# Altium PCB OSSI-1 COMMS.PcbDoc (part 2 of 2)
Units mil, origin at the board's own origin, x right, y up, seen from the top; angles counter-clockwise.
Board outline 3701 x 3701 mil, 2 copper layers (Top, Bottom), stack 61.811 mil thick; 188 components, 164 nets, 655 pads, 444 vias.
Unrouted connection lines stored in the file: 11.
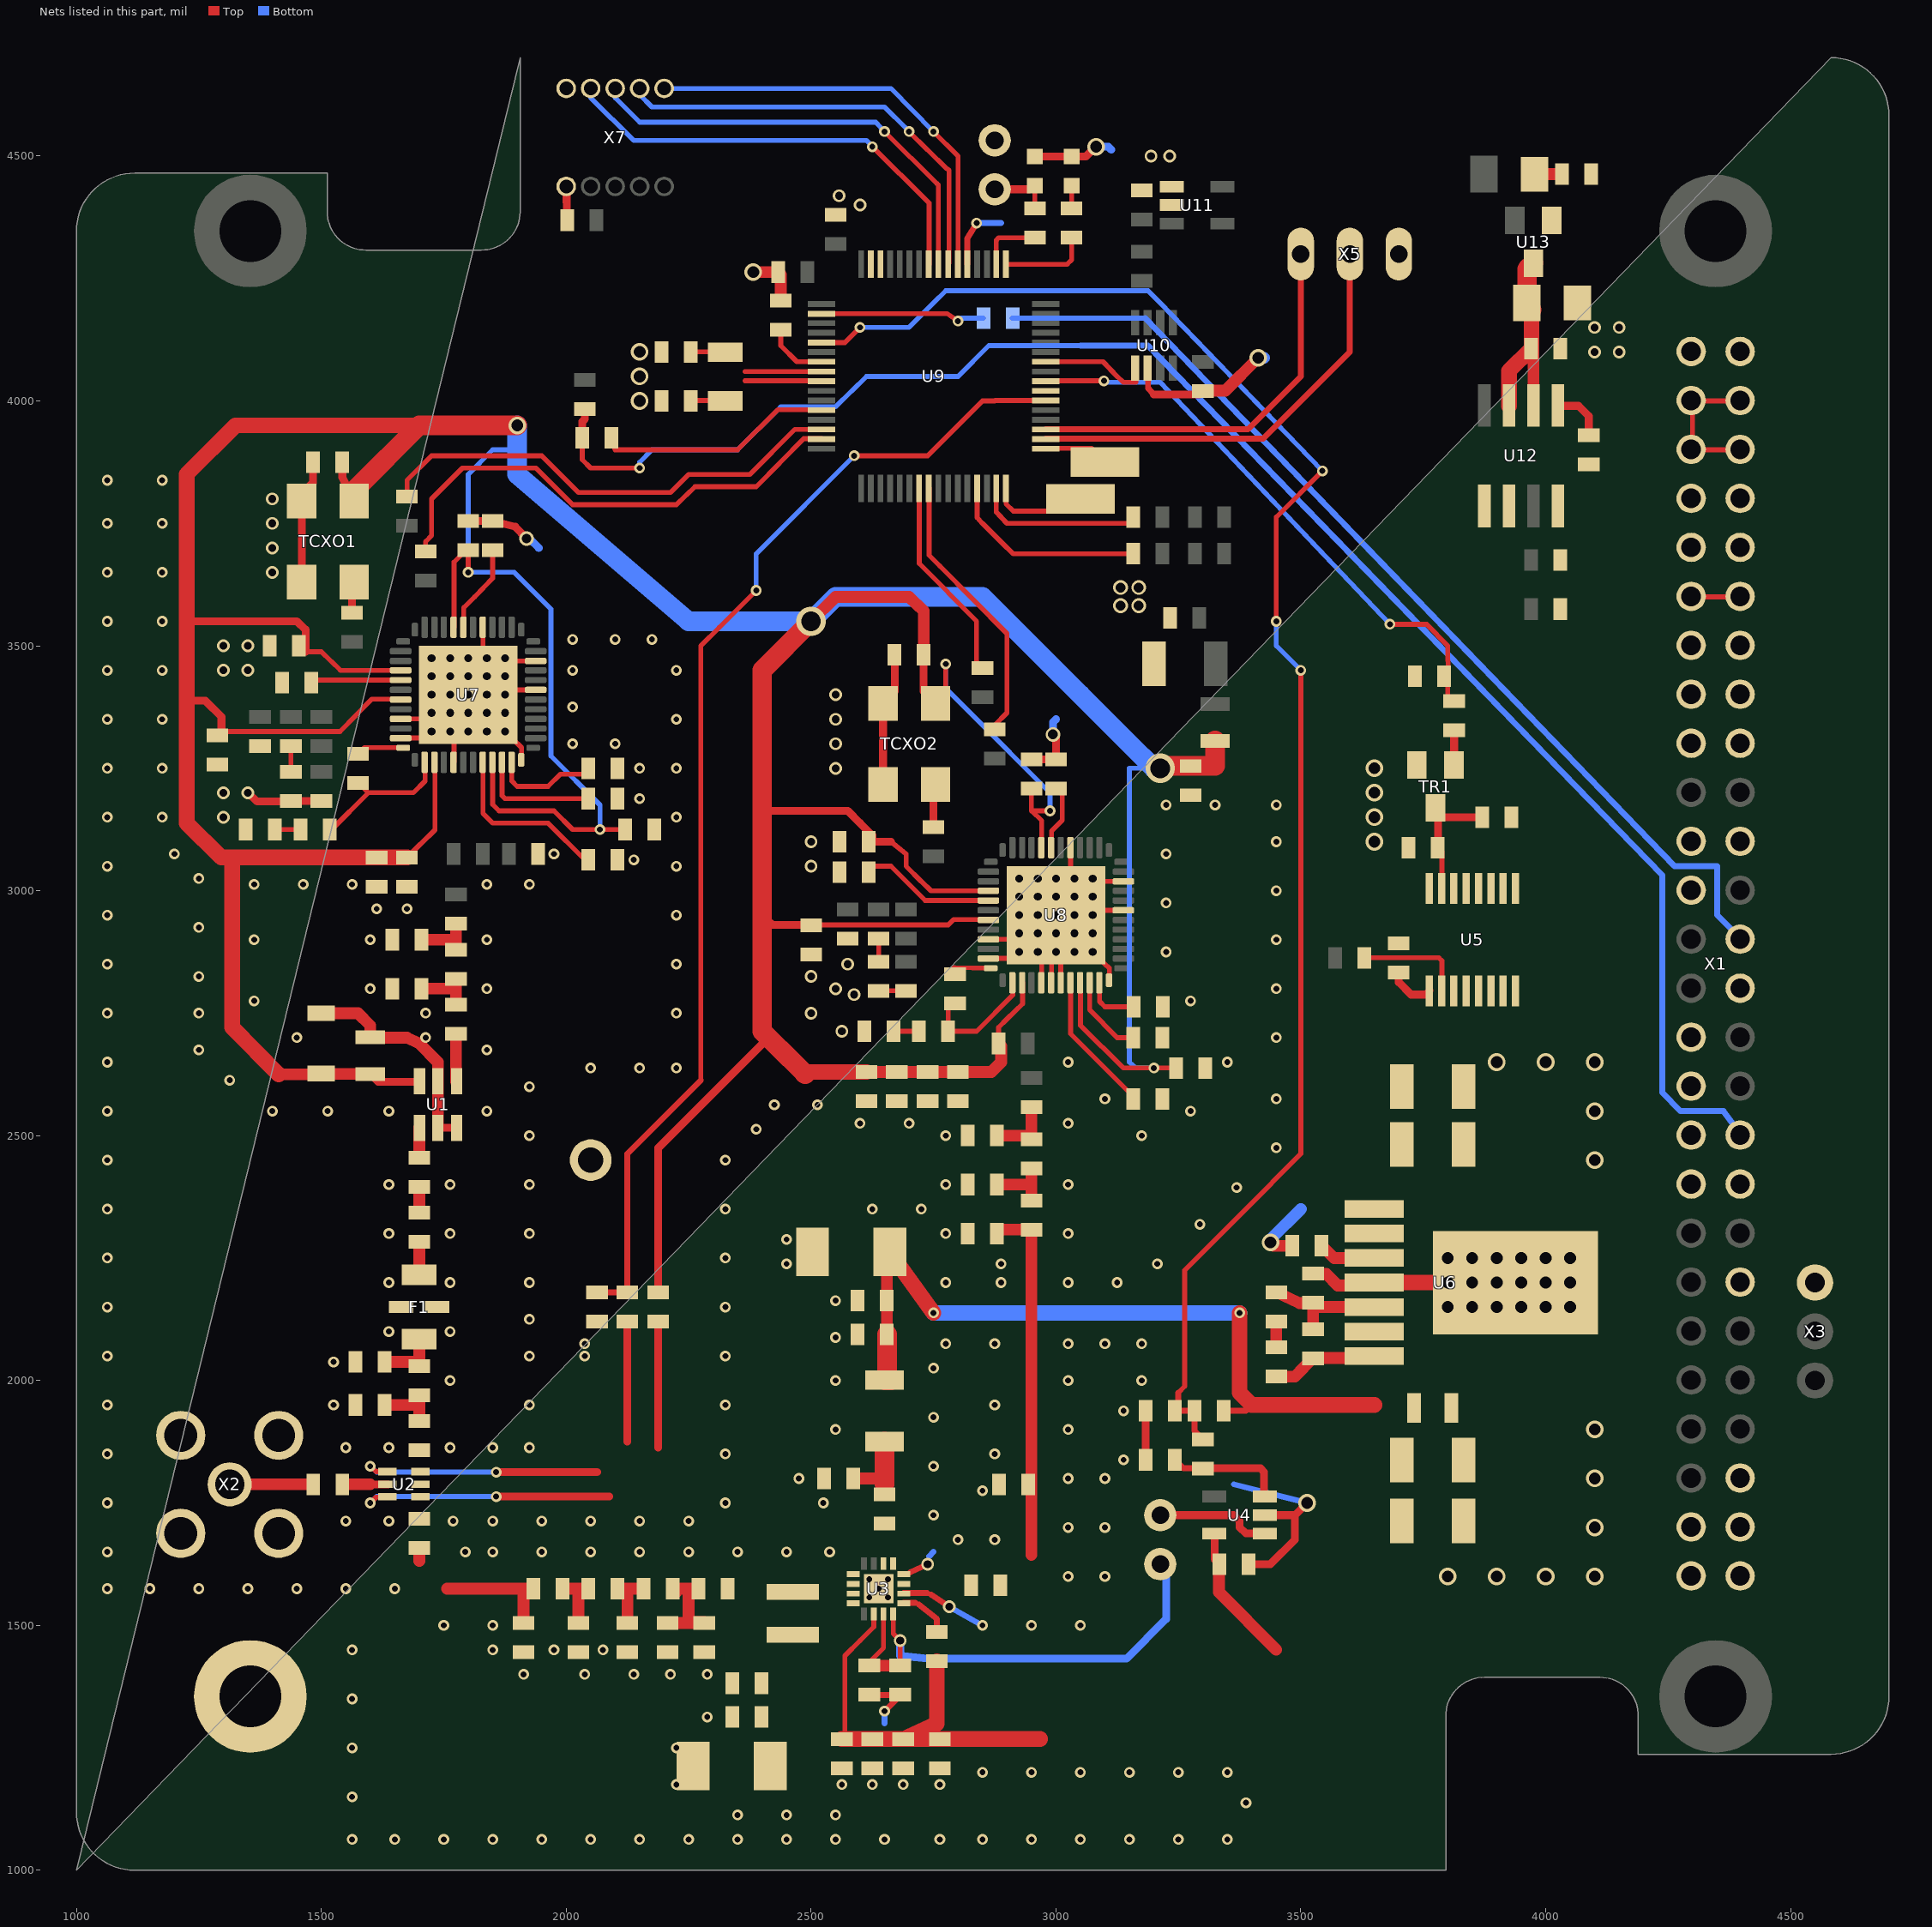
[diagram p2: the nets of this part, all layers, seen from the top]

## Via types
v1: diameter 22/22 (per signal layer), hole 12, Top to Bottom, 306 vias
v2: diameter 26/26 (per signal layer), hole 16, Top to Bottom, 87 vias
v3: diameter 36/36 (per signal layer), hole 24, Top to Bottom, 43 vias
v4: diameter 30/30 (per signal layer), hole 20, Top to Bottom, 6 vias
v5: diameter 60/60 (per signal layer), hole 40, Top to Bottom, 2 vias

## Nets (pads, with @x,y where several pads share a name; then routed paths per layer and width w, separated by ;. In a path a pad name is that pad's centre, name@x,y a point inside that pad or via, vN(x,y) a via of type N, cw(c..) or ccw(c..) an arc to the next point about the centre after c; other vN are vias at no path point) (continued)
GND: C1.2 C2.2 C5.2 C6.P$2 C7.2 C11.P$2 C12.2 C13.2 C14.2 C16.1 C17.1 C18.2 C19.2 C20.2 C21.2 C22.2 C23.1 C27.2 C28.1 C29.2 C30.2 C31.2 C32.1 C33.2 C34.2 C35.2 C36.1 C37.P$2 C39.2 C40.2 C41.P$2 C42.P$2 C43.2 C44.2 C45.P$2 C46.P$2 C47.2 C48.2 C49.2 C50.2 C51.2 C52.2 C53.2 C56.2 C57.2 C58.2 C59.2 C60.2 C62.2 C63.2 C64.2 C65.2 C66.2 C67.2 C69.2 C70.2 C72.2 C73.2 C74.2 C75.2 C76.2 C77.2 C79.2 C80.2 C81.2 C82.2 C83.2 C84.2 C85.2 C86.2 C87.2 C88.2 C89.2 C91.2 C92.P$2 C93.2 F1.2 F1.4 JP2.2 L2.2 L4.2 LED1.C LED2.C R1.1 R4.1 R7.2 R8.2 R11.1 R13.2 R17.1 R18.2 R19.2 R22.1 R23.1 R24.1 R41.2 R42.1 R43.1 TCXO1.1 TCXO1.2 TCXO2.1 TCXO2.2 TP1.TP TR1.2 U1.2 U1.3 U1.5 U2.2 U3.2 U3.4 U3.TPAD U4.2 U5.8 U6.4 U6.PAD U7.5 U7.12 U7.19 U7.22 U7.29 U7.45 U7.47 U7.EXP U8.5 U8.6 U8.7 U8.12 U8.19 U8.22 U8.29 U8.45 U8.47 U8.EXP U9.53 U9.62 U9.63 U10.2 U11.1 U11.2 U12.4 U13.1 X1.1 X1.2 X1.51 X1.52 X2.2 X2.3 X2.4 X2.5 X3.3 X5.1 X7.9 | length 5529.6
  Top w4: U1.5@1738,2610 1738,2650
  Top w10: C58.2@1438,3183 C58.2@1450,3183 ; U7.47@1663,3312 1712,3312 1750,3350 v2(1763,3363) 1751,3351 U7.45@1663,3351 ; v2(1763,3325) 1771,3318 U7.5@1771,3263 ; U7.29@1830,3538 1830,3446 v2(1838,3438) 1850,3450 1869,3469 U7.22@1938,3469 ; v2(1838,3400) 1848,3410 U7.19@1938,3410 ; v2(1875,3325) 1909,3292 U7.12@1909,3268 ; C73.2@2638,2796 C73.2@2638,2788 ; C73.2@2638,2800 C73.2@2638,2788 ; C72.2@2694,2796 2646,2796 C73.2@2638,2788 ; U8.47@2863,2862 2912,2862 2950,2900 v2(2963,2913) 2951,2901 2863,2901 3000,2901 3000,2900 3010,2891 U8.7@3010,2813 ; v2(2963,2875) 2971,2868 U8.5@2971,2813 ; U8.6@2991,2813 2991,2866 v2(3000,2875) ; v2(3000,2913) v2(3000,2950) ; U8.29@3030,3088 3030,3033 v2(3038,3025) ; v2(3038,2950) 3048,2960 U8.19@3138,2960 ; v2(3038,2988) U8.EXP@3050,3000 ; v2(3075,2875) 3100,2850 3109,2842 U8.12@3109,2818 ; U8.22@3138,3019 U8.EXP@3069,3019 ; U4.2@3427,1725 3488,1725 ; U8.EXP@3050,3000 U8.EXP@3069,3019 ; U8.EXP@3050,3000 U8.EXP@3069,3019
  Top w12: C32.1@2619,1358 2680,1358 2675,1350 C28.1@2682,1357 ; v1(2650,1325) C28.1@2682,1357 ; U3.2@2689,1566 2737,1566 ; U3.4@2689,1605 U3.4@2695,1605 ; U3.4@2702,1608 v2(2738,1625) ; 2745,1563 v2(2782,1538) ; U9.53@2819,4279 2819,4332 v1(2838,4363) ; U10.2@3188,4067 3188,4026 3200,4013 ; C28.1@2682,1357 2682,1358 C28.1@2682,1357
  Top w16: v2(1350,3200) 1369,3182 1438,3182 1440,3183 1450,3183 C57.2@1500,3183 ; TCXO1.2@1460,3630 1460,3791 TCXO1.1@1450,3800 ; TCXO1.1@1460,3796 1460,3810 TCXO1.1@1450,3800 ; C59.2@1483,3875 1483,3833 TCXO1.1@1450,3800 ; U1.2@1738,2516 U1.3@1775,2516 ; C51.2@1800,3755 C50.2@1850,3755 1896,3743 v4(1919,3719) ; TCXO2.2@2647,3218 2647,3383 2671,3407 C76.2@2671,3482 ; C67.2@2950,3268 C66.2@3000,3268 3000,3313 v4(2994,3319) ; LED2.C@2957,4499 LED1.C@3032,4499 3061,4499 v3(3082,4519) ; C39.2@3183,1838 R13.2@3183,1938 ; 3200,4013 3293,4013 C85.2@3300,4021 ; C47.2@3393,1625 3438,1625 3488,1675 3488,1725 ; U4.2@3427,1725 3488,1725 ; v3(3513,1750) 3488,1725
  Top w24: C6.P$2@1500,2749 1502,2750 1575,2750 1600,2725 1600,2700 1601,2700 1675,2700 1700,2688 1738,2650 1738,2610 U1.2@1738,2516 ; v3(2382,4263) 2388,4263 C84.2@2433,4263 2438,4258 C82.2@2438,4205 ; C85.2@3300,4021 3346,4021 v3(3413,4088) ; v3(3438,2282) 3444,2275 C43.2@3483,2275 ; R8.2@3525,2218 3552,2218 3575,2194 3644,2194 U6.4@3650,2200
  Top w32: U6.4@3650,2200 v3(3800,2200) v3(3900,2200)
  Bottom w12: 2650,1300 v1(2650,1325) ; v2(2738,1625) v2@2740,1625 ; 2741,1641 2750,1650 ; v2(2782,1538) v1(2850,1500) ; v1(2838,4363) 2863,4363 2888,4363 ; 3363,1788 v3(3513,1750)
  Bottom w16: v4(1919,3719) 1925,3719 1944,3700 ; v4(2994,3319) 2994,3344 3000,3350 ; v3(3082,4519) 3107,4519 3113,4513
  Bottom w24: v3(3413,4088) v3@3425,4088 ; v3(3438,2282) 3438,2288 3500,2350
  other v1: 1563,1063 1650,1063 1750,1063 1850,1063 1950,1063 2050,1063 2150,1063 2250,1063 2350,1063 2450,1063 2550,1063 2650,1063 2763,1063 2850,1063 2950,1063 3050,1063 3150,1063 3250,1063 3350,1063 2350,1113 2450,1113 2550,1113 3388,1138 1563,1150 2225,1175 2563,1175 2625,1175 2688,1175 2763,1175 2850,1200 2950,1200 3050,1200 3150,1200 3250,1200 3350,1200 1563,1250 2225,1250 2288,1313 1563,1350 1913,1400 2038,1400 2138,1400 2213,1400 2288,1400 1563,1450 1850,1450 1975,1450 2075,1450 1750,1500 1850,1500 2950,1500 3050,1500 2619,1557 2657,1557 1063,1575 1150,1575 1250,1575 1350,1575 1450,1575 1550,1575 1650,1575 2638,1575 2619,1594 2657,1594 3025,1600 3100,1600 1063,1650 1794,1650 1850,1650 1950,1650 2050,1650 2150,1650 2250,1650 2350,1650 2450,1650 2538,1650 2800,1675 2875,1675 3025,1700 3100,1700 1550,1713 1638,1713 1769,1713 1850,1713 1950,1713 2050,1713 2150,1713 2250,1713 2750,1725 1063,1750 2325,1750 2525,1750 2850,1775 2475,1800 3025,1800 3100,1800 2750,1825 3138,1838 1063,1850 2325,1850 2875,1850 1550,1863 1638,1863 1763,1863 1850,1863 1925,1863 2550,1900 3025,1900 2750,1925 3138,1938 1063,1950 1525,1950 1925,1950 2325,1950 2875,1950 1763,2000 2550,2000 3025,2000 3175,2000 2750,2025 1525,2038 1063,2050 1925,2050 2038,2050 2325,2050 2038,2075 2775,2075 2875,2075 3025,2075 3100,2075 3175,2075 2550,2088 1638,2100 1763,2100 1925,2125 1063,2150 2325,2150 2550,2163 1638,2200 1763,2200 1925,2200 2775,2200 2888,2200 3025,2200 3125,2200 2450,2238 2888,2238 3207,2238 1063,2250 2325,2250 2450,2288 1638,2300 1763,2300 1925,2300 2775,2300 3025,2300 3294,2319 1063,2350 2325,2350 2625,2350 2725,2350 3369,2394 1638,2400 1763,2400 1925,2400 2775,2400 3025,2400 1063,2450 2325,2450 3450,2475 1925,2500 2775,2500 3175,2500 2388,2513 2600,2525 2700,2525 3025,2525 1063,2550 1400,2550 1513,2550 1638,2550 1838,2550 3275,2550 2425,2563 2513,2563 3100,2575 3450,2575 1925,2600 1313,2613 2050,2638 2150,2638 2225,2638 1063,2650 3025,2650 3350,2650 1250,2675 1838,2675 1450,2700 1713,2700 3450,2700 1063,2750 1250,2750 1713,2750 2225,2750 1363,2775 3275,2775 1600,2800 1838,2800 3450,2800 1250,2825 1063,2850 2225,2850 3225,2875 1363,2900 1600,2900 1838,2900 3450,2900 1250,2925 1063,2950 2225,2950 1613,2963 1675,2963 3225,2975 3450,3000 1363,3013 1463,3013 1563,3013 1838,3013 1925,3013 1250,3025 1063,3050 2225,3050 2138,3063 1200,3075 1975,3075 3225,3075 3450,3100 1063,3150 1175,3150 2225,3150 3225,3175 3325,3175 3450,3175 2150,3188 1063,3250 1175,3250 2150,3250 2225,3250 2013,3300 2100,3300 1063,3350 1175,3350 2225,3350 2013,3375 1063,3450 1175,3450 2013,3450 2225,3450 2013,3513 2100,3513 2175,3513 1063,3550 1175,3550 1063,3650 1175,3650 1063,3750 1175,3750 1063,3838 1175,3838
  other v2: 2563,2713 2500,2750 2588,2788 2550,2800 2500,2825 2575,2850 2925,2875 3038,2875 2925,2913 3038,2913 3075,2913 2925,2950 2963,2950 3075,2950 2925,2988 2963,2988 3000,2988 3075,2988 2925,3025 2963,3025 3000,3025 3075,3025 2500,3050 2500,3100 1300,3150 1300,3200 2550,3250 2550,3300 1725,3325 1800,3325 1838,3325 2550,3350 1725,3363 1800,3363 1838,3363 1875,3363 1725,3400 1763,3400 1800,3400 1875,3400 2550,3400 1725,3438 1763,3438 1800,3438 1875,3438 1300,3450 1350,3450 1725,3475 1763,3475 1800,3475 1838,3475 1875,3475 1300,3500 1350,3500 1400,3650 1400,3700 1400,3750 1400,3800 4100,4100 4150,4100 4100,4150 4150,4150 2600,4400 2557,4419 3194,4500 3232,4500
  other v3: 3800,1600 3900,1600 4000,1600 4100,1600 4100,1700 4100,1800 4100,1900 3800,2150 3850,2150 3900,2150 3950,2150 4000,2150 4050,2150 3850,2200 3950,2200 4000,2200 4050,2200 3800,2250 3850,2250 3900,2250 3950,2250 4000,2250 4050,2250 4100,2450 4100,2550 3900,2650 4000,2650 4100,2650 3650,3100 3650,3150 3650,3200 3650,3250 2150,4000 2150,4050 2150,4100
  other v4: 3132,3582 3169,3582 3132,3619 3169,3619
LED1: R39.1 U9.50 | length 130.1
  Top w10: U9.50@2878,4279 2878,4328 2882,4332 2883,4333 R39.1@2957,4333
LED_-FAULT: X1.28
LED_OFF: X1.23
LED_SCL: X1.33
LED_SDA: X1.35
N$1: C60.1 U7.41 | length 195.1
  Top w10: C60.1@1480,3425 1475,3425 1480,3430 U7.41@1663,3430
N$2: R40.1 X7.10 | length 69
  Top w16: X7.10@2000,4438 R40.1@2002,4369
N$3: C65.1 U8.11 | length 112.6
  Top w10: U8.11@3089,2813 3089,2774 3100,2763 C65.1@3158,2763
N$4: C23.2 C26.2 L10.1 | length 123
  Top w24: L10.1@2105,1575 2125,1575 ; C23.2@2125,1505 2125,1575 ; C26.2@2158,1575 2125,1575
N$5: C81.1 Q1.1 U9.8 | length 227
  Top w10: C81.1@2255,4100 2256,4100 Q1.1@2325,4100 ; 2365,4060 U9.8@2522,4060
N$6: C80.1 Q1.2 U9.9 | length 227.4
  Top w10: C80.1@2255,4000 2256,4001 Q1.2@2325,4001 ; 2365,4041 U9.9@2522,4041
N$7: L5.1 U1.1 | length 62
  Top w16: U1.1@1700,2516 U1.1@1701,2516
  Top w24: L5.1@1700,2455 U1.1@1700,2516
N$8: C8.1 L5.2 | length 53
  Top w24: C8.1@1700,2343 L5.2@1700,2396
N$9: C50.1 U7.31 | length 182.2
  Top w10: U7.31@1791,3538 1791,3578 1813,3600 1850,3638 C50.1@1850,3696
N$10: C49.1 U7.11 | length 215.6
  Top w10: U7.11@1889,3263 1889,3224 1900,3213 1963,3213 1988,3238 2033,3238 C49.1@2046,3250
N$11: C88.1 C89.1 U12.6 U12.7 U13.3 | length 438.3
  Top w24: C88.1@3971,4107 3975,4102 U12.6@3975,3990
  Top w32: U12.7@3925,3990 3925,4061 3971,4107 C89.1@3971,4186
  Top w40: C89.1@3971,4186 3962,4196 3962,4200 3962,4269 U13.3@3975,4282
N$12: R42.2 U12.5 | length 120.7
  Top w16: U12.5@4025,3990 4067,3990 4088,3969 R42.2@4088,3930 ; R42.2@4088,3930 4088,3925 R42.2@4088,3930
N$13: C82.1 U9.7 | length 130.7
  Top w10: C82.1@2438,4146 2438,4138 2438,4113 2471,4080 U9.7@2522,4080
N$14: C4.2 U1.4 | length 98
  Top w24: U1.4@1775,2610 C4.2@1775,2708
N$15: C5.1 F1.1 L6.1 | length 133
  Top w24: C5.1@1630,2038 L6.1@1700,2038 ; F1.1@1700,2085 L6.1@1700,2038 ; L6.1@1700,2038 1700,2030 L6.1@1700,2038
N$16: C8.2 F1.3 | length 67
  Top w24: F1.3@1700,2216 C8.2@1700,2283
N$17: U9.57 X7.7 | length 923.8
  Top w10: v1(2625,4519) 2738,4407 2741,4404 U9.57@2741,4279
  Bottom w10: X7.7@2050,4638 2050,4619 2138,4532 2613,4532 v1(2625,4519)
N$18: U9.56 X7.5 | length 914.7
  Top w10: v1(2650,4550) 2757,4444 2760,4441 U9.56@2760,4279
  Bottom w10: X7.5@2100,4638 2100,4619 2150,4569 2632,4569 v1(2650,4550)
N$19: U9.55 X7.3 | length 901.1
  Top w10: v1(2700,4550) 2777,4474 2778,4474 2782,4471 2782,4281 U9.55@2780,4279
  Bottom w10: X7.3@2150,4638 2150,4625 2175,4600 2650,4600 2694,4557 v1(2700,4550)
N$20: U9.54 X7.1 | length 878.5
  Top w10: v1(2750,4550) 2800,4500 2800,4400 U9.54@2800,4279
  Bottom w10: X7.1@2200,4638 2650,4638 2663,4638 v1(2750,4550)
N$21: C9.1 L4.1 L6.2 | length 123
  Top w24: L4.1@1630,1950 1700,1950 ; C9.1@1700,1918 1700,1950 ; L6.2@1700,1971 1700,1950
N$22: C55.1 U7.48 | length 97.7
  Top w10: C55.1@1575,3280 1588,3292 U7.48@1668,3292
N$23: C17.2 L8.1 L10.2 | length 123
  Top w24: L8.1@1993,1575 1994,1575 2025,1575 ; C17.2@2025,1505 2025,1575 ; L10.2@2046,1575 2025,1575
N$24: R19.1 U7.8 | length 360.4
  Top w10: U7.8@1830,3263 1830,3158 1850,3138 1963,3138 2038,3063 R19.1@2046,3063
N$25: R18.1 U7.10 | length 248.5
  Top w10: U7.10@1869,3263 1869,3194 1875,3188 R18.1@2046,3188
N$26: C54.2 R17.2 | length 53
  Top w10: R17.2@1405,3125 C54.2@1458,3125
N$27: C71.1 U8.48 | length 102.2
  Top w10: C71.1@2794,2830 C71.1@2793,2843 ; U8.48@2868,2842 2830,2842 C71.1@2793,2843 ; C71.1@2793,2843 2788,2838 C71.1@2793,2843
N$28: R22.2 U8.10 | length 168.9
  Top w10: U8.10@3069,2813 3069,2757 3125,2700 R22.2@3158,2700
N$29: C68.2 R23.2 | length 53
  Top w10: R23.2@2668,2713 C68.2@2721,2713
N$30: R24.2 U8.8 | length 298.1
  Top w10: U8.8@3030,2813 3030,2708 3163,2575 R24.2@3158,2575
N$31: C77.1 U8.41 | length 279
  Top w10: C77.1@2618,3038 2630,3050 2663,3050 2733,2980 U8.41@2863,2980
N$32: C66.1 U8.31 | length 134.8
  Top w10: U8.31@2991,3088 2991,3122 3013,3144 3013,3196 C66.1@3000,3208
N$33: C20.1 C25.1 L12.2 R4.2 | length 876.3
  Top w10: C25.1@2886,1582 C25.1@2888,1582
  Top w12: R4.2@2943,1783 R4.2@2943,1788 ; 2944,1650 R4.2@2944,1782
  Top w24: C20.1@2880,2300 2888,2308 L12.2@2950,2308 2950,1644
N$34: C68.1 C71.2 U8.2 | length 253.5
  Top w10: C71.2@2794,2771 2780,2760 2780,2713 2838,2713 2912,2787 U8.2@2912,2813
N$35: C54.1 C55.2 U7.2 | length 303.7
  Top w10: C54.1@1518,3125 1521,3125 1596,3200 ; C55.2@1575,3221 1596,3200 ; U7.2@1712,3263 1712,3224 1688,3200 1596,3200
N$36: C18.1 C24.2 L11.1 | length 137.9
  Top w16: L11.1@2943,2500 L11.1@2950,2493
  Top w24: C18.1@2880,2500 L11.1@2943,2500 ; L11.1@2950,2493 C24.2@2950,2558
N$37: C19.1 L11.2 L12.1 | length 168
  Top w16: 2950,2400 L11.2@2950,2433
  Top w24: C19.1@2880,2400 2950,2400 ; L12.1@2950,2368 2950,2400 ; L11.2@2950,2433 2950,2400
N$38: C73.1 R26.1 | length 47
  Top w10: C73.1@2638,2855 R26.1@2638,2902
N$39: C15.2 C16.2 L8.2 | length 287.2
  Top w10: C15.2@1700,1650 1701,1662 C15.2@1700,1658
  Top w24: 1700,1632 1700,1650 C15.2@1700,1657 ; 1757,1575 1913,1575 ; C16.2@1913,1505 1913,1575 ; L8.2@1933,1575 1913,1575
N$40: C58.1 R21.1 | length 53
  Top w10: C58.1@1438,3243 R21.1@1438,3296
N$41: C10.2 U2.5 | length 93
  Top w16: 1600,1788 U2.5@1636,1788
  Top w24: C10.2@1543,1788 1600,1788
N$42: R2.2 U2.4 | length 754
  Top w10: v1(1600,1825) 1612,1814 U2.4@1636,1814
  Top w16: v1(1857,1813) 2063,1813 ; 2125,1875 R2.2@2125,2121
  Bottom w10: v1(1600,1825) 1613,1813 v1(1857,1813)
N$43: C4.1 L2.1 L3.2 | length 123
  Top w24: L2.1@1705,2800 1775,2800 ; C4.1@1775,2768 1775,2800 ; L3.2@1775,2821 1775,2800
N$44: R3.1 U2.6 | length 792.4
  Top w10: v1(1600,1750) 1612,1762 U2.6@1636,1762
  Top w16: v1(1857,1763) 2088,1763 ; 2188,1863 R3.1@2188,2121
  Bottom w10: v1(1600,1750) 1613,1763 v1(1857,1763)
N$45: LED1.A R38.2 | length 47
  Top w10: R38.2@3032,4393 LED1.A@3032,4440
N$46: C10.1 X2.1 | length 170
  Top w24: X2.1@1313,1788 C10.1@1483,1788
N$47: C40.1 R15.1 TR1.3 U5.7 | length 261.4
  Top w10: C40.1@3780,3088 3788,3080 U5.7@3788,3005
  Top w16: TR1.3@3775,3170 3780,3165 TR1.3@3780,3150 ; C40.1@3780,3088 TR1.3@3780,3150 ; R15.1@3871,3150 TR1.3@3780,3150
N$48: R38.1 U9.49 | length 182.7
  Top w10: U9.49@2898,4279 3023,4279 3032,4288 R38.1@3032,4333
N$49: JP2.1 LED2.A R39.2 | length 132.6
  Top w10: R39.2@2957,4393 LED2.A@2957,4440
  Top w16: JP2.1@2875,4432 2945,4432 2950,4438 2952,4440 LED2.A@2957,4440
N$50: C43.1 U6.3 | length 117.4
  Top w24: C43.1@3543,2275 3568,2250 U6.3@3650,2250
N$51: R10.1 TR1.1 | length 71
  Top w16: TR1.1@3813,3256 3813,3280 R10.1@3813,3327
N$52: C41.P$1 C42.P$1 U5.2 U5.3 U5.6 U5.11 U5.14 U5.15 U6.1 U6.2
N$53: R6.2 R8.1 R9.2 U6.5 | length 261.2
  Top w24: R6.2@3450,2180 3497,2158 R8.1@3525,2158 ; R9.2@3525,2105 R8.1@3525,2158 ; U6.5@3650,2150 3533,2150 R8.1@3525,2158
N$54: C38.2 R6.1 | length 53
  Top w24: C38.2@3450,2068 R6.1@3450,2121
N$55: R11.2 U5.9 | length 96.7
  Top w16: R11.2@3700,2833 3700,2813 3725,2788 3755,2788 U5.9@3763,2796
N$56: U9.35 X5.3 | length 815.7
  Top w12: U9.35@2979,3942 3392,3942 3500,4050 X5.3@3500,4300
N$57: U9.34 X5.2 | length 894.3
  Top w12: U9.34@2979,3923 3423,3923 3600,4100 X5.2@3600,4300
N$58: C15.1 U2.1
N$59: C9.2 U2.3
N$60: R27.2 U9.29 | length 409.7
  Top w10: U9.29@2839,3822 2839,3762 2850,3750 2900,3700 2913,3688 R27.2@3158,3688
N$61: R30.2 U9.31 | length 344.5
  Top w10: U9.31@2878,3822 2878,3773 2900,3750 3050,3750 3146,3750 R30.2@3158,3763
N$62: C2.1 C3.2 L3.1 | length 123
  Top w24: C2.1@1705,2900 1775,2900 ; L3.1@1775,2880 1775,2888 1775,2900 ; C3.2@1775,2933 1775,2900
N$63: R34.1 U9.15 | length 1022.1
  Top w10: R34.1@1713,3693 1713,3713 1725,3725 1725,3800 1788,3863 1938,3863 2013,3788 2225,3788 2263,3825 2375,3825 2388,3825 2485,3923 U9.15@2522,3923
N$64: R35.1 U9.14 | length 985.2
  Top w10: R35.1@1675,3805 1675,3838 1725,3888 1950,3888 2025,3813 2213,3813 2250,3850 2363,3850 2375,3850 2467,3942 U9.14@2522,3942
N$65: R28.1 U9.23 | length 419.9
  Top w10: U9.23@2721,3822 2721,3668 2838,3550 2838,3468 R28.1@2850,3455
N$66: C61.1 TCXO1.3 | length 106.2
  Top w16: C61.1@1563,3568 1563,3652 TCXO1.3@1566,3630
N$67: R29.1 U9.24 | length 567.9
  Top w10: U9.24@2741,3822 2741,3685 2763,3663 2900,3525 2900,3363 2875,3338 R29.1@2875,3330
N$68: C78.1 TCXO2.3 | length 90
  Top w16: C78.1@2750,3130 2750,3215 TCXO2.3@2754,3218
N$69: U9.42 U10.1 | length 230.8
  Top w10: U9.42@2979,4080 3096,4080 3125,4050 3138,4038 3163,4038 3163,4063 3163,4066 U10.1@3162,4067
N$70: C39.1 R14.2 U4.3 | length 243.9
  Top w12: C39.1@3243,1838 3260,1821 R14.2@3300,1821
  Top w16: R14.2@3300,1821 3418,1821 3425,1813 3425,1764 U4.3@3427,1763
N$71: C21.1 C22.1 C26.1 L13.2 | length 243.2
  Top w10: C21.1@2280,1505 C21.1@2282,1505
  Top w24: C22.1@2207,1505 2280,1505 2282,1507 2250,1507 2250,1569 2244,1575 ; C26.1@2225,1568 2218,1575 2244,1575 ; L13.2@2271,1575 2244,1575
N$72: L9.2 U3.5 U3.6
N$73: C25.2 U3.3
N$74: C90.2 R41.1 | length 56
  Top w24: C90.2@3977,4463 R41.1@4033,4463
N$75: L13.1 L15.P$1 U3.9 U3.10 U3.11 U3.12
N$76: JP1.2 U4.1 | length 236.7
  Top w16: JP1.2@3213,1725 3363,1725 3375,1713 3375,1700 3388,1688 U4.1@3427,1688
N$77: U9.33 X6.1 | length 132.9
  Top w10: U9.33@2979,3903 3073,3903 X6.1@3100,3875
N$78: U9.32 X4.1 | length 200.6
  Top w10: U9.32@2898,3822 2898,3790 2913,3775 3025,3775 X4.1@3050,3800
N$79: C14.1 L7.P$2 L9.1 | length 171
  Top w24: C14.1@2586,1800 2650,1800 ; L9.1@2650,1768 2650,1788
  Top w40: 2650,1788 2650,1800 L7.P$2@2650,1875
N$80: R5.1 U3.1 | length 98.6
  Top w12: U3.1@2689,1546 2713,1546 ; 2720,1543 2757,1513 R5.1@2757,1486
OBC_-FAULT: R33.2 R36.1 X1.34 | length 3535.6
  Top w10: R33.2@2033,3925 2033,3880 2050,3863 v1(2150,3863)
  Top w16: R33.2@2033,3925 2033,3958 2038,3963 R36.1@2038,3983
  Bottom w10: v1(2150,3863) 2150,3875 2175,3900 2350,3900 2438,3988 2550,3988 2613,4050 2638,4050 2800,4050 2863,4113 3050,4113
  Bottom w12: 3050,4113 3188,4113 4238,3032 4238,2588 4275,2550 4363,2550 4400,2500 4397,2500 X1.34@4397,2501
OBC_-FAULT_IN: R33.1 U9.12 | length 481.9
  Top w10: R33.1@2093,3925 2100,3900 2350,3900 2432,3982 U9.12@2522,3982
OBC_OFF: R37.2 X1.26 | length 2088.6
  Bottom w10: R37.2@2911,4169 3182,4169
  Bottom w12: 3182,4169 4263,3050 4350,3050 4350,2950 4400,2900 4400,2901 X1.26@4397,2901
OBC_OFF_OUT: R37.1 U9.2 | length 336.8
  Top w10: U9.2@2522,4178 2778,4178 v1(2800,4163)
  Bottom w10: v1(2800,4163) 2807,4169 R37.1@2852,4169
PA_-FAULT: R12.2 U5.10 | length 225.5
  Top w10: R12.2@3630,2863 3782,2863 3788,2857 U5.10@3788,2796 ; U5.10@3788,2796 3788,2794 U5.10@3788,2796
PA_BIAS: R13.1 R14.1 R16.2 U9.5 | length 3415.9
  Top w10: U9.5@2522,4119 2569,4119 v1(2600,4150) ; 3250,1975 3263,1988 3263,2225 3382,2344 3500,2463 v1(3500,3450) ; v1(3450,3550) 3450,3763 v1(3544,3857)
  Top w12: 3250,1975 3250,1938 3243,1938 R16.2@3283,1938 3283,1897 R14.1@3300,1880
  Bottom w10: v1(2600,4150) 2700,4150 2750,4200 2775,4225 3175,4225 3188,4225 3213,4200 v1(3544,3857) ; v1(3450,3550) 3450,3500 v1(3500,3450)
PA_ON: R7.1 R10.2 U9.40 | length 1192.5
  Top w10: U9.40@2979,4041 v1(3098,4041) ; v1(3682,3544) 3757,3544 3800,3500 3800,3470 3801,3469 3800,3450 3800,3399 R10.2@3813,3386
  Top w12: R7.1@3793,3438 3793,3443 R7.1@3800,3450
  Bottom w10: v1(3098,4041) 3097,4041 3096,4042 3100,4038 3213,4038 v1(3682,3544)
PANELTEMP_SCL: X1.29
PANELTEMP_SDA: X1.31
RX_ON: U9.39
SC_-ON: X1.40
SC_-PFO: X1.48
SCCHG_EN: X1.21
SCOUT_-PG: X1.50
SCOUT_EN: X1.22
SOLAR_-ON: X1.36
SOLAR_CS1: X1.15
SOLAR_CS2: X1.14
SOLAR_CS3: X1.17
SOLAR_CS4: X1.16
SOLAR_CS5: X1.18
STRUT_GND: H4.B3,2
SUPERCAP_TEMP: X1.49
TX_ON: R1.2 R2.1 U9.38 | length 2399.6
  Top w10: 2275,2613 2275,3500 2313,3538 v1(2388,3613) ; v1(2588,3888) 2738,3888 2850,4000 2875,4000 2876,4001 U9.38@2979,4001
  Top w12: R1.2@2063,2180 2125,2180 2125,2463 2275,2613
  Bottom w10: v1(2388,3613) 2388,3688 v1(2588,3888)
VAPC: C28.2 C32.2 JP1.1 U3.15 U3.16 | length 1033.6
  Top w10: C32.2@2613,1419 2648,1454 U3.15@2648,1524 ; U3.16@2668,1524 2668,1483 v2(2682,1469) C28.2@2682,1418
  Top w12: C32.2@2613,1413 2618,1418 C32.2@2619,1418 2618,1419 C32.2@2613,1419
  Top w24: C32.2@2619,1418 C28.2@2682,1418
  Bottom w16: v2(2682,1469) 2682,1438 2738,1432 3125,1432 3144,1432 3225,1513 3225,1613 JP1.1@3213,1625
VBAT: X1.11 X1.12 | length 106.3
  Top w10: X1.11@4297,3601 4300,3600 4400,3600 X1.12@4397,3601
VBUS: R15.2 U5.1 U5.4 U5.5 U5.12 U5.13 U5.16 U12.1 U12.2 X1.7 X1.8 X1.9 X1.10
VCCRF: C6.P$1 C7.1 C29.1 C34.1 C48.1 C51.1 C52.1 C53.1 C56.1 C59.1 C63.1 C64.1 C67.1 C69.1 C70.1 C74.1 C76.1 C79.1 C93.1 L14.2 L16.2 R3.2 TCXO1.4 TCXO2.4 U1.6 U7.3 U7.9 U7.32 U7.40 U7.43 U8.3 U8.9 U8.32 U8.40 U8.43 | length 13583.8
  Top w10: C56.1@1288,3318 1293,3318 C56.1@1300,3325 ; C56.1@1296,3325 C56.1@1300,3325 ; C63.1@1468,3488 1500,3488 1539,3450 U7.40@1663,3450 ; U7.43@1663,3391 1603,3391 1538,3325 C56.1@1300,3325 ; C52.1@1675,3068 1732,3124 U7.3@1732,3263 ; U7.32@1771,3538 1771,3671 C51.1@1800,3700 ; v1(1800,3650) C51.1@1800,3700 ; C51.1@1800,3696 C51.1@1800,3700 ; U7.9@1850,3263 1850,3176 1863,3163 1975,3163 2013,3125 v1(2069,3125) C48.1@2121,3125 ; 2450,2650 2457,2657 ; C79.1@2500,2930 2780,2930 2788,2938 2791,2941 U8.43@2863,2941 ; C74.1@2618,3100 C74.1@2625,3100 ; 2663,3100 2694,3075 2694,3050 2725,3019 2745,3000 U8.40@2863,3000 ; TCXO2.4@2754,3383 2750,3386 2750,3400 2775,3375 v1(2775,3463) ; L14.2@2883,2688 2883,2721 2900,2738 2932,2769 U8.3@2932,2813 ; C67.1@2950,3208 2950,3163 ; U8.32@2971,3088 2971,3143 2950,3163 ; v1(2988,3163) 2975,3163 2950,3163 ; U8.9@3050,2813 3050,2812 3050,2725 3138,2638 v1(3200,2638) C64.1@3246,2638
  Top w16: 1225,3388 1263,3388 1296,3355 C56.1@1296,3325 ; 1225,3550 1450,3550 1468,3533 1468,3488 C63.1@1455,3500 ; 1318,3068 1613,3068 C52.1@1675,3068 ; C59.1@1543,3875 1543,3844 1566,3796 TCXO1.4@1571,3821 ; C7.1@1600,2626 1616,2610 U1.6@1701,2610 ; R3.2@2188,2180 2188,2475 2413,2700 ; 2400,2950 2421,2930 C79.1@2500,2930 ; 2400,3163 2575,3163 2600,3138 2625,3113 2625,3100 2663,3100 ; C76.1@2730,3482 2730,3407 TCXO2.4@2754,3383
  Top w24: 1413,2625 1499,2625 C6.P$1@1500,2626.98 1500,2625 1501,2626 C7.1@1600,2626 ; v5(2500,3550) 2550,3600 2700,3600 2730,3571 C76.1@2730,3482 ; C70.1@2613,2630 2675,2630 2738,2630 2800,2630 2868,2630 2888,2650 2888,2683 L14.2@2883,2688
  Top w32: 1413,2625 1318,2721 1318,3068 ; C52.1@1675,3068 1613,3068 1318,3068 ; 1713,3950 1325,3950 1225,3850 1225,3550 1225,3388 1225,3138 1296,3068 1318,3068 ; 2482,2632 2483,2630 C70.1@2613,2630
  Top w40: TCXO1.4@1571,3821 1700,3950 1713,3950 v3(1900,3950) ; 2488,2625 2482,2632 2457,2657 2413,2700 2400,2713 2400,2950 2400,3163 2400,3450 v5(2500,3550) ; v5(3213,3250) 3218,3255 3325,3255 ; C93.1@3275,3255 3325,3255 ; L16.2@3325,3307 3325,3255
  Bottom w10: 1900,3900 1850,3900 1800,3850 1800,3750 v1(1800,3650) 1894,3650 1969,3575 1969,3275 2069,3175 v1(2069,3125) ; v1(2775,3463) 2775,3413 2825,3363 2988,3200 v1(2988,3163) ; v1(3200,2638) 3163,2638 3150,2650 3150,3250 v5@3200,3250
  Bottom w40: v3(1900,3950) 1900,3900 1900,3850 2250,3550 v5(2500,3550) 2550,3600 2850,3600 3050,3400 3150,3300 3200,3250 v5(3213,3250)
VCOMMS_PA: C11.P$1 C12.1 C13.1 C27.1 C30.1 C31.1 C33.1 C35.1 C36.2 C37.P$1 C38.1 C44.1 C45.P$1 C46.P$1 C47.1 L7.P$1 L15.P$2 R5.2 R9.1 R16.1 U3.14 U4.5 U6.6 U6.7 | length 3428.7
  Top w10: C27.1@2575,1263 2569,1269 2569,1438 2600,1469 2628,1497 U3.14@2628,1524
  Top w12: C11.P$1@2655,2270 2658,2170 2663,2263 2673,2238 C11.P$1@2660,2263 ; R16.1@3343,1938 3388,1938 3400,1950
  Top w16: U4.5@3324,1688 3324,1635 C47.1@3333,1625
  Top w24: C13.1@2655,2094 2655,2163 C11.P$1@2655,2270 ; C47.1@3333,1625 3333,1568 3450,1450 ; C38.1@3450,2008 3488,2008 3525,2046 3646,2046 U6.7@3650,2050
  Top w32: C27.1@2563,1268 2724,1268 2725,1269 2625,1268 C35.1@2688,1268 ; C11.P$1@2660,2263 v1(2750,2138) ; R5.2@2757,1427 2757,1299 C35.1@2688,1268 ; 2968,1268 C36.2@2763,1268 C35.1@2688,1268 ; v1(3375,2138) 3375,1975 3400,1950 3650,1950
  Top w40: L7.P$1@2650,2000.99 2651,2000 2663,2000 2655,2008 C13.1@2655,2094
  Bottom w32: v1(2750,2138) 3038,2138 3050,2138 v1(3375,2138)
VSOLAR: X1.3 X1.4 X1.5 X1.6 | length 309.6
  Top w10: X1.6@4397,3901 4400,3900 4300,3900 X1.5@4297,3901 4300,3906 X1.3@4300,4000 ; X1.4@4397,4001 4394,4000 X1.3@4300,4000 ; X1.3@4300,4000 X1.3@4297,4001 X1.3@4300,4000
VSUPERCAP: X1.13
pads on no net: H1.B3,2 H2.B3,2 H3.B3,2 U3.7 U3.8 U3.13 U4.4 U7.4 U7.13 U7.14 U7.15 U7.16 U7.17 U7.18 U7.20 U7.21 U7.23 U7.30 U7.38 U7.44 U7.46 U8.13 U8.14 U8.15 U8.16 U8.17 U8.18 U8.20 U8.21 U8.23 U8.30 U8.33 U8.38 U8.44 U8.46 U9.3 U9.4 U9.6 U9.10 U9.11 U9.28 U9.30 U9.41 U9.43 U9.44 U9.45 U9.46 U9.47 U9.48 U9.51 U9.52 U9.59 U9.60 U9.61 U10.3 X7.2 X7.6 X7.8
copper on no net: | length 729.6
  Top w10: 1563,3508 ccw(c1602,3508) 1602,3469 ; 2325,4001 cw(c2365,4001) 2365,4041 ; 2325,4100 ccw(c2365,4100) 2365,4060 ; 2750,3050 ccw(c2781.5,3050.5) 2782,3019
  Top w12: 2695,1605 ccw(c2694.88,1614.95) 2702,1608 ; 2713,1546 cw(c2712.88,1536.05) 2720,1543 ; 2737,1566 cw(c2737.38,1554.84) 2745,1563 ; 2943,1783 ccw(c2944,1783) 2944,1782 ; 2944,1650 ccw(c2950,1650) 2950,1644
  Top w16: 2063,1813 ccw(c2063,1875) 2125,1875 ; 2088,1763 ccw(c2088,1863) 2188,1863
  Top w24: 1700,1632 ccw(c1757,1632) 1757,1575 ; 2888,1582 ccw(c2888,1644) 2950,1644
  Bottom w12: 2740,1625 ccw(c2721.19,1634.21) 2741,1641

## Polygon pours and split planes (outlines as drawn)
GND on Bottom "Bottom-GND" (solid, remove dead copper, pour order 2): 998,4502 1502,4502 1502,4302 1898,4302 1898,4702 4702,4702 4702,1248 4198,1248 4198,1398 3802,1398 3802,998 998,998
GND on Top "Top-GND" (solid, remove dead copper, pour order 4): 4011,3548 4065,3548 4065,3712.17 4215,3862.17 4215,4073 4590,4073 4590,4165 4175.83,4165 4127,4213.83 4127,4540 4061,4540 4061,4402 3998,4402 3998,4336 4073,4336 4073,4240 4011,4240 4011,4073 4148,4073 4148,3890 4011,3890
GND on Top "Top-GND 1" (solid, remove dead copper, pour order 6): 3767,1548 3767,2671 4159,2671 4159,1548
GND on Top "Top-GND 2" (solid, remove dead copper, pour order 8): 1262.17,3277 1348,3277 1348,3309 1402,3309 1402,3161 1377,3161 1377,3098 1306.17,3098 1255,3149.17 1255,3269.83
GND on Top "Top-GND 3" (solid, remove dead copper, pour order 10): 1248,3534 1427,3534 1427,3386 1299.17,3386 1248,3437.17
GND on Top "Top-GND 4" (solid, remove dead copper, pour order 12): 1446,3592 1446,3846 1298,3846 1298,3592
GND on Top "Top-GND 5" (solid, remove dead copper, pour order 14): 2530,4425 2530,4367 2617,4367 2617,4248 2646,4248 2646,4400.81 2607.84,4440 2530,4440
GND on Top "Top-GND 6" (solid, remove dead copper, pour order 16): 3259,4386 3212.24,4386 3155,4437.1 3155,4521 3259,4521
GND on Top "Top-GND 7" (solid, remove dead copper, pour order 18): 2209,3967 2209,4142 2346,4142 2346,4196 2193.17,4196 2086,4088.83 2086,3967
GND on Top "Top-GND 8" (solid, remove dead copper, pour order 20): 3255,3320 3255,3580 3249,3580 3249,3643 3108,3643 3108,3452 3152,3452 3152,3320
GND on Top "Top-GND 9" (solid, remove dead copper, pour order 22): 3681.22,2886 3765,2886 3765,3046 3734,3046 3734,3465 3598,3465 3598,2962.12
GND on Top "Top-GND 10" (solid, remove dead copper, pour order 24): 1823,2540 1823,3027 1936,3027 1936,3102 2015,3102 2015,3027 2098,3027 2098,3090 2161,3090 2161,3161 2086,3161 2086,3286 1998,3286 1998,3527 2240,3527 2240,2611 1952,2611 1952,1848 1749,1848 1748,2486 1723,2486 1723,2540
GND on Top "Top-GND 11" (solid, remove dead copper, pour order 26): 1190,3852 1190,3125.83 1277,3038.83 1277,2700.83 1400.83,2577 1652,2577 1652,2073 1577,2073 1577,1915 1652,1915 1652,1848 1636,1848 1636,1849 1048,1849 1048,3852
GND on Top "Top-GND 12" (solid, remove dead copper, pour order 28): 2542,1221 3402,1221 3402,1042 1548,1042 1548,1602 1650.78,1602 1732.78,1527 1877,1527 1877,1465 2359,1465 2359,1280 2334,1280 2334,1134 2542,1134
GND on Top "Top-GND 13" (solid, remove dead copper, pour order 30): 3198,3202 3198,2673 3286,2673 3286,2602 3198,2602 3198,2527 3138.83,2527 3115,2550.83 3115,2600.83 3015,2700.83 3015,2777 2998,2777 2998,1588.93 2924.27,1527 2811,1527 2811,1473 3127,1473 3127,1762.16 3163.81,1798 3202,1798 3202,2206.16 3477,2474.16 3477,3202
GND on Top "Top-GND 14" (solid, remove dead copper, pour order 32): 2298,2500.83 2387.17,2590 2840,2590 2840,2252 2902,2252 2902,1648 2752,1648 2752,1611 2724.17,1611 2711,1624.17 2711,2065 2761,2065 2761,2336 2590,2336 2590,1848 2552,1848 2552,1648 2298,1648
GND on Top "Top-GND 15" (solid, remove dead copper, pour order 34): 2652,3413 2652,3186 2448,3186 2448,3440 2652,3440
GND on Top "Top-GND 16" (solid, remove dead copper, pour order 36): 2577,3127 2577,2998 2448,2998 2448,3127
GND on Top "Top-GND 17" (solid, remove dead copper, pour order 38): 2448,2890 2548,2890 2548,2915 2602,2915 2602,2815 2640,2815 2640,2661 2512.18,2661 2448,2724.16
GND on Top "Top-GND 18" (solid, remove dead copper, pour order 40): 998,1902 1252,1902 1252,1727 1652,1727 1652,1536 998,1536
GND on Top "Top-GND 19" (solid, remove dead copper, pour order 42): 1636,1848 1648.67,1848 1661,1818.6 1661,1757.39 1648.65,1727 1636,1727 1636,1694.38 1670.91,1737.17 1676.75,1780 1731.35,1780 1748,1767.98 1748,1662.17 1774.17,1636 2552,1636 2552,1700.69 2525.98,1734 1827,1734 1827,1884 1748,1884 1748,1808.02 1731.35,1796 1676.75,1796 1670.91,1838.82 1644.96,1871 1636,1871
GND on Top "Top-GND 20" (solid, remove dead copper, pour order 44): 1348,3027 1348,2749.17 1424.17,2673 1727,2673 1727,2765 1652,2765 1652,2936 1727,2936 1727,3027
GND on Top "Top-GND 21" (solid, remove dead copper, pour order 46): 2080,2130 2080,2020 1995,2020 1995,2130
N$73 on Top "Top-N$73" (solid, remove dead copper, pour order 48): 2680,1590 2680,1580 2737.77,1580 2793.77,1567 2840,1567 2840,1602 2793.79,1602 2737.79,1590
N$75 on Top "Top-N$75" (solid, remove dead copper, pour order 50): 2596,1609 2596,1542 2574.12,1542 2562.12,1555 2317,1555 2317,1596 2562.17,1596 2567.48,1601.3 2574.08,1609
N$72 on Top "Top-N$72" (solid, remove dead copper, pour order 52): 2644,1614 2644,1653.17 2638.64,1658.53 2625,1671.12 2625,1725 2671.92,1725 2679,1716.74 2679,1659.17 2673,1653.17 2673,1614 2663,1614 2663,1639 2654,1639 2654,1614
VBUS on Top "Top-VBUS" (solid, remove dead copper, pour order 54): 4590,3661 4250.83,3661 4246.45,3656.62 4140,3544.2 4140,2842 3946,2842 3946,2761 3930,2761 3930,2842 3871,2842 3871,2761 3836,2761 3836,3034 3871,3034 3871,2959 3930,2959 3930,3248 3861,3248 3861,3827 3940,3827 3940,3465 4086,3465 4086,3682.83 4237.17,3834 4590,3834
VSOLAR on Top "Top-VSOLAR" (solid, remove dead copper, pour order 56): 4270,4030 4270,3858 4430,3858 4430,4030
3.3VOBC on Top "Top-3.3VOBC" (solid, remove dead copper, pour order 58): 4270,1930 4270,1870 4430,1870 4430,1930
VBAT on Top "Top-VBAT" (solid, remove dead copper, pour order 60): 4270,3630 4430,3630 4430,3570 4270,3570
VCOMMS_PA on Top "Top-VCOMMS_PA" (solid, remove dead copper, pour order 62): 3589,2118 3589,1727.07 3279.93,1418 3145,1418 3145,1402 3565.01,1402 3724,1554.87 3724,2118
VCOMMS_PA on Top "Top-VCOMMS_PA 1" (solid, remove dead copper, pour order 64): 3611.72,1446 2811,1446 2811,1248 3419.85,1248
VCOMMS_PA on Top "Top-VCOMMS_PA 2" (solid, remove dead copper, pour order 66): 2380,1155 2380,1490 2521,1490 2521,1296 2852,1296 2852,1248 2521,1248 2521,1155
N$52 on Top "Top-N$52" (solid, remove dead copper, pour order 68): 3921,2827 3880,2827 3880,2746 3821,2746 3821,3048 3880,3048 3880,2980 3921,2980 3921,3102 3805,3102 3805,2746 3592,2746 3592,2280 3734,2280 3734,2692 3921,2692
N$58 on Top "Top-N$58" (solid, remove dead copper, pour order 70): 1686,1765 1721,1765 1721,1705 1686,1705
N$59 on Top "Top-N$59" (solid, remove dead copper, pour order 72): 1686,1871 1686,1811 1721,1811 1721,1871
N$63 on Top "Top-N$63" (solid, remove dead copper, pour order 74): 1686,1765 1721,1765 1721,1705 1686,1705

## Keep-outs
Keep-Out Layer:
  lines w0: 1000,1119 ccw(c1119,1119) 1119,1000 3796,1000 3796,1315 cw(c3875,1315) 3875,1394 4111,1394 cw(c4110.5,1315.5) 4189,1315 4189,1237 4583,1237 ccw(c4583,1355) 4701,1355 4701,4583 ccw(c4583,4583) 4583,4701 1906,4701 1906,4386 cw(c1827.5,4386.5) 1827,4308 1591,4308 cw(c1590.5,4386.5) 1512,4386 1512,4465 1119,4465 ccw(c1118.5,4346.5) 1000,4347 1000,1119

## Other copper
Top:
  text "RXD" at 3525,4425 h42.5 r90
  text "TXD" at 3625,4425 h42.5 r90
  text "GND" at 3725,4425 h42.5 r90
  text "GND" at 4575,3925 h42.5 r90
  text "VBUS" at 4575,3463 h42.5 r90
  text "GND" at 4575,2675 h42.5 r90
  text "SCL" at 4575,2500 h42.5 r90
  text "SDA" at 4575,2313 h42.5 r90
  text "GND" at 2080,2250 h42.5 r90
Bottom:
  pour cut-out net N$45: 1000,1000 1010,1000 1010,1010 1000,1010
  pour cut-out net N$45: 1000,1000 1010,1000 1010,1010 1000,1010
  pour cut-out net N$45: 1000,1000 1010,1000 1010,1010 1000,1010
  pour cut-out net N$45: 1000,1000 1010,1000 1010,1010 1000,1010

## Silkscreen, mask and mechanical layers (free items; w line width, h text height)
Top Solder:
  text "RXD" at 3525,4425 h42.5 r90
  text "TXD" at 3625,4425 h42.5 r90
  text "GND" at 3725,4425 h42.5 r90
  text "GND" at 4575,3925 h42.5 r90
  text "VBUS" at 4575,3463 h42.5 r90
  text "GND" at 4575,2675 h42.5 r90
  text "SCL" at 4575,2500 h42.5 r90
  text "SDA" at 4575,2313 h42.5 r90
  text "GND" at 2080,2250 h42.5 r90
Dimension:
  lines w0: 1000,1119 ccw(c1119,1119) 1119,1000 3796,1000 3796,1315 cw(c3875,1315) 3875,1394 4111,1394 cw(c4110.5,1315.5) 4189,1315 4189,1237 4583,1237 ccw(c4583,1355) 4701,1355 4701,4583 ccw(c4583,4583) 4583,4701 1906,4701 1906,4386 cw(c1827.5,4386.5) 1827,4308 1591,4308 cw(c1590.5,4386.5) 1512,4386 1512,4465 1119,4465 ccw(c1118.5,4346.5) 1000,4347 1000,1119
Unrouted:
  lines w0: 4297,2100 4300,2100

## Text inside footprints (layer, text, board x,y; h text height)
C1: tNames ">NAME" at 1878,3110 h77.5; tValues ">VALUE" at 1878,2995 h77.5
C2: tNames ">NAME" at 1710,2865 h77.5 r180; tValues ">VALUE" at 1710,2980 h77.5 r180
C3: tNames ">NAME" at 1810,2998 h77.5 r270; tValues ">VALUE" at 1695,2998 h77.5 r270
C4: tNames ">NAME" at 1810,2773 h77.5 r270; tValues ">VALUE" at 1695,2773 h77.5 r270
C5: tNames ">NAME" at 1635,2003 h77.5 r180; tValues ">VALUE" at 1635,2118 h77.5 r180
C6: tNames ">NAME" at 1450,2563 h77.5 r90; tValues ">VALUE" at 1600,2563 h77.5 r90
C7: tNames ">NAME" at 1560,2628 h77.5 r90; tValues ">VALUE" at 1690,2628 h77.5 r90
C8: tNames ">NAME" at 1735,2348 h77.5 r270; tValues ">VALUE" at 1620,2348 h77.5 r270
C9: tNames ">NAME" at 1735,1923 h77.5 r270; tValues ">VALUE" at 1620,1923 h77.5 r270
C10: tNames ">NAME" at 1478,1823 h77.5; tValues ">VALUE" at 1478,1708 h77.5
C12: tNames ">NAME" at 2660,2128 h77.5 r180; tValues ">VALUE" at 2660,2243 h77.5 r180
C13: tNames ">NAME" at 2660,2059 h77.5 r180; tValues ">VALUE" at 2660,2174 h77.5 r180
C14: tNames ">NAME" at 2592,1765 h77.5 r180; tValues ">VALUE" at 2592,1880 h77.5 r180
C15: tNames ">NAME" at 1735,1723 h77.5 r270; tValues ">VALUE" at 1620,1723 h77.5 r270
C16: tNames ">NAME" at 1878,1440 h77.5 r90; tValues ">VALUE" at 1993,1440 h77.5 r90
C17: tNames ">NAME" at 1990,1440 h77.5 r90; tValues ">VALUE" at 2105,1440 h77.5 r90
C18: tNames ">NAME" at 2885,2465 h77.5 r180; tValues ">VALUE" at 2885,2580 h77.5 r180
C19: tNames ">NAME" at 2885,2365 h77.5 r180; tValues ">VALUE" at 2885,2480 h77.5 r180
C20: tNames ">NAME" at 2885,2265 h77.5 r180; tValues ">VALUE" at 2885,2380 h77.5 r180
C21: tNames ">NAME" at 2317,1510 h77.5 r270; tValues ">VALUE" at 2202,1510 h77.5 r270
C22: tNames ">NAME" at 2242,1510 h77.5 r270; tValues ">VALUE" at 2127,1510 h77.5 r270
C23: tNames ">NAME" at 2090,1440 h77.5 r90; tValues ">VALUE" at 2205,1440 h77.5 r90
C24: tNames ">NAME" at 2985,2623 h77.5 r270; tValues ">VALUE" at 2870,2623 h77.5 r270
C25: tNames ">NAME" at 2892,1547 h77.5 r180; tValues ">VALUE" at 2892,1662 h77.5 r180
C26: tNames ">NAME" at 2223,1540 h77.5 r180; tValues ">VALUE" at 2223,1655 h77.5 r180
C27: tNames ">NAME" at 2598,1273 h77.5 r270; tValues ">VALUE" at 2483,1273 h77.5 r270
C28: tNames ">NAME" at 2647,1353 h77.5 r90; tValues ">VALUE" at 2762,1353 h77.5 r90
C29: tNames ">NAME" at 2835,2635 h77.5 r270; tValues ">VALUE" at 2720,2635 h77.5 r270
C30: tNames ">NAME" at 2404,1347 h77.5 r180; tValues ">VALUE" at 2404,1462 h77.5 r180
C31: tNames ">NAME" at 2660,1273 h77.5 r270; tValues ">VALUE" at 2545,1273 h77.5 r270
C32: tNames ">NAME" at 2584,1353 h77.5 r90; tValues ">VALUE" at 2699,1353 h77.5 r90
C33: tNames ">NAME" at 2404,1278 h77.5 r180; tValues ">VALUE" at 2404,1393 h77.5 r180
C34: tNames ">NAME" at 2773,2635 h77.5 r270; tValues ">VALUE" at 2658,2635 h77.5 r270
C35: tNames ">NAME" at 2723,1273 h77.5 r270; tValues ">VALUE" at 2608,1273 h77.5 r270
C36: tNames ">NAME" at 2728,1203 h77.5 r90; tValues ">VALUE" at 2843,1203 h77.5 r90
C38: tNames ">NAME" at 3415,2003 h77.5 r90; tValues ">VALUE" at 3530,2003 h77.5 r90
C39: tNames ">NAME" at 3248,1803 h77.5 r180; tValues ">VALUE" at 3248,1918 h77.5 r180
C40: tNames ">NAME" at 3785,3053 h77.5 r180; tValues ">VALUE" at 3785,3168 h77.5 r180
C41: tNames ">NAME" at 3644,2675 h77.5; tValues ">VALUE" at 3644,2475 h77.5
C42: tNames ">NAME" at 3644,2557 h77.5; tValues ">VALUE" at 3644,2357 h77.5
C43: tNames ">NAME" at 3548,2240 h77.5 r180; tValues ">VALUE" at 3548,2355 h77.5 r180
C44: tNames ">NAME" at 3734,1984 h77.5; tValues ">VALUE" at 3734,1854 h77.5
C45: tNames ">NAME" at 3644,1913 h77.5; tValues ">VALUE" at 3644,1713 h77.5
C46: tNames ">NAME" at 3644,1788 h77.5; tValues ">VALUE" at 3644,1588 h77.5
C47: tNames ">NAME" at 3328,1660 h77.5; tValues ">VALUE" at 3328,1545 h77.5
C48: tNames ">NAME" at 2115,3160 h77.5; tValues ">VALUE" at 2115,3045 h77.5
C49: tNames ">NAME" at 2040,3285 h77.5; tValues ">VALUE" at 2040,3170 h77.5
C50: tNames ">NAME" at 1815,3690 h77.5 r90; tValues ">VALUE" at 1930,3690 h77.5 r90
C51: tNames ">NAME" at 1765,3690 h77.5 r90; tValues ">VALUE" at 1880,3690 h77.5 r90
C52: tNames ">NAME" at 1710,3073 h77.5 r270; tValues ">VALUE" at 1595,3073 h77.5 r270
C53: tNames ">NAME" at 1648,3073 h77.5 r270; tValues ">VALUE" at 1533,3073 h77.5 r270
C54: tNames ">NAME" at 1523,3090 h77.5 r180; tValues ">VALUE" at 1523,3205 h77.5 r180
C55: tNames ">NAME" at 1610,3285 h77.5 r270; tValues ">VALUE" at 1495,3285 h77.5 r270
C56: tNames ">NAME" at 1323,3323 h77.5 r270; tValues ">VALUE" at 1208,3323 h77.5 r270
C57: tNames ">NAME" at 1535,3248 h77.5 r270; tValues ">VALUE" at 1420,3248 h77.5 r270
C58: tNames ">NAME" at 1473,3248 h77.5 r270; tValues ">VALUE" at 1358,3248 h77.5 r270
C59: tNames ">NAME" at 1548,3840 h77.5 r180; tValues ">VALUE" at 1548,3955 h77.5 r180
C60: tNames ">NAME" at 1485,3390 h77.5 r180; tValues ">VALUE" at 1485,3505 h77.5 r180
C61: tNames ">NAME" at 1598,3573 h77.5 r270; tValues ">VALUE" at 1483,3573 h77.5 r270
C62: tNames ">NAME" at 1410,3360 h77.5 r270; tValues ">VALUE" at 1295,3360 h77.5 r270
C63: tNames ">NAME" at 1460,3465 h77.5 r180; tValues ">VALUE" at 1460,3580 h77.5 r180
C64: tNames ">NAME" at 3240,2673 h77.5; tValues ">VALUE" at 3240,2558 h77.5
C65: tNames ">NAME" at 3153,2798 h77.5; tValues ">VALUE" at 3153,2683 h77.5
C66: tNames ">NAME" at 2965,3203 h77.5 r90; tValues ">VALUE" at 3080,3203 h77.5 r90
C67: tNames ">NAME" at 2915,3203 h77.5 r90; tValues ">VALUE" at 3030,3203 h77.5 r90
C68: tNames ">NAME" at 2785,2678 h77.5 r180; tValues ">VALUE" at 2785,2793 h77.5 r180
C69: tNames ">NAME" at 2710,2635 h77.5 r270; tValues ">VALUE" at 2595,2635 h77.5 r270
C70: tNames ">NAME" at 2648,2635 h77.5 r270; tValues ">VALUE" at 2533,2635 h77.5 r270
C71: tNames ">NAME" at 2829,2835 h77.5 r270; tValues ">VALUE" at 2714,2835 h77.5 r270
C72: tNames ">NAME" at 2729,2860 h77.5 r270; tValues ">VALUE" at 2614,2860 h77.5 r270
C73: tNames ">NAME" at 2673,2860 h77.5 r270; tValues ">VALUE" at 2558,2860 h77.5 r270
C74: tNames ">NAME" at 2623,3065 h77.5 r180; tValues ">VALUE" at 2623,3180 h77.5 r180
C75: tNames ">NAME" at 2610,2967 h77.5 r270; tValues ">VALUE" at 2495,2967 h77.5 r270
C76: tNames ">NAME" at 2735,3447 h77.5 r180; tValues ">VALUE" at 2735,3562 h77.5 r180
C77: tNames ">NAME" at 2623,3003 h77.5 r180; tValues ">VALUE" at 2623,3118 h77.5 r180
C78: tNames ">NAME" at 2785,3135 h77.5 r270; tValues ">VALUE" at 2670,3135 h77.5 r270
C79: tNames ">NAME" at 2535,2935 h77.5 r270; tValues ">VALUE" at 2420,2935 h77.5 r270
C80: tNames ">NAME" at 2260,3965 h77.5 r180; tValues ">VALUE" at 2260,4080 h77.5 r180
C81: tNames ">NAME" at 2260,4065 h77.5 r180; tValues ">VALUE" at 2260,4180 h77.5 r180
C82: tNames ">NAME" at 2403,4140 h77.5 r90; tValues ">VALUE" at 2518,4140 h77.5 r90
C83: tNames ">NAME" at 3140,4365 h77.5 r90; tValues ">VALUE" at 3255,4365 h77.5 r90
C84: tNames ">NAME" at 2498,4228 h77.5 r180; tValues ">VALUE" at 2498,4343 h77.5 r180
C85: tNames ">NAME" at 3335,4085 h77.5 r270; tValues ">VALUE" at 3220,4085 h77.5 r270
C86: tNames ">NAME" at 2515,4315 h77.5 r90; tValues ">VALUE" at 2630,4315 h77.5 r90
C87: tNames ">NAME" at 3965,3610 h77.5; tValues ">VALUE" at 3965,3495 h77.5
C88: tNames ">NAME" at 3965,4142 h77.5; tValues ">VALUE" at 3965,4027 h77.5
C89: tNames ">NAME" at 3903,4240 h77.5; tValues ">VALUE" at 3903,4110 h77.5; Top Overlay "+" at 3888,4175 h77.5
C90: tNames ">NAME" at 3815,4503 h77.5; tValues ">VALUE" at 3815,4373 h77.5; Top Overlay "+" at 3800,4438 h77.5
C91: tNames ">NAME" at 3298,3522 h77.5 r180; tValues ">VALUE" at 3298,3637 h77.5 r180
C92: tNames ">NAME" at 3388,3388 h77.5 r180; tValues ">VALUE" at 3388,3588 h77.5 r180
C93: tNames ">NAME" at 3310,3260 h77.5 r270; tValues ">VALUE" at 3195,3260 h77.5 r270
F1: tNames ">NAME" at 1857.48,1953.15 h108.5 r90; tValues ">VALUE" at 1936.22,1953.15 h108.5 r90
JP1: tNames ">NAME" at 3148,1575 h77.5 r90; tValues ">VALUE" at 3328,1575 h77.5 r90
JP2: tNames ">NAME" at 2810,4382 h77.5 r90; tValues ">VALUE" at 2990,4382 h77.5 r90
L1: tNames ">NAME" at 1835,3040 h77.5 r180; tValues ">VALUE" at 1835,3155 h77.5 r180
L2: tNames ">NAME" at 1710,2765 h77.5 r180; tValues ">VALUE" at 1710,2880 h77.5 r180
L3: tNames ">NAME" at 1810,2885 h77.5 r270; tValues ">VALUE" at 1695,2885 h77.5 r270
L4: tNames ">NAME" at 1635,1915 h77.5 r180; tValues ">VALUE" at 1635,2030 h77.5 r180
L5: tNames ">NAME" at 1735,2460 h77.5 r270; tValues ">VALUE" at 1620,2460 h77.5 r270
L6: tNames ">NAME" at 1735,2035 h77.5 r270; tValues ">VALUE" at 1620,2035 h77.5 r270
L7: tNames ">NAME" at 2725,2063 h77.5 r270; tValues ">VALUE" at 2525,2063 h77.5 r270
L8: tNames ">NAME" at 1998,1540 h77.5 r180; tValues ">VALUE" at 1998,1655 h77.5 r180
L9: tNames ">NAME" at 2685,1773 h77.5 r270; tValues ">VALUE" at 2570,1773 h77.5 r270
L10: tNames ">NAME" at 2110,1540 h77.5 r180; tValues ">VALUE" at 2110,1655 h77.5 r180
L11: tNames ">NAME" at 2985,2498 h77.5 r270; tValues ">VALUE" at 2870,2498 h77.5 r270
L12: tNames ">NAME" at 2985,2373 h77.5 r270; tValues ">VALUE" at 2870,2373 h77.5 r270
L13: tNames ">NAME" at 2335,1540 h77.5 r180; tValues ">VALUE" at 2335,1655 h77.5 r180
L14: tNames ">NAME" at 2948,2653 h77.5 r180; tValues ">VALUE" at 2948,2768 h77.5 r180
L15: tNames ">NAME" at 2563,1650 h77.5 r270; tValues ">VALUE" at 2313,1650 h77.5 r270
L16: tNames ">NAME" at 3365,3379 h77.5 r270; tValues ">VALUE" at 3235,3379 h77.5 r270
LED1: tNames ">NAME" at 3007,4419 h77.5 r90; tValues ">VALUE" at 3107,4419 h77.5 r90
LED2: tNames ">NAME" at 2932,4419 h77.5 r90; tValues ">VALUE" at 3032,4419 h77.5 r90
Q1: tNames ">NAME" at 2475,4150 h108.5 r270; tValues ">VALUE" at 2400,4150 h108.5 r270
R1: tNames ">NAME" at 2028,2115 h77.5 r90; tValues ">VALUE" at 2143,2115 h77.5 r90